# Altium PCB Gandhvedhh.U.K.PcbDoc (part 2 of 2)
Units mil, origin at the board's own origin, x right, y up, seen from the top; angles counter-clockwise.
Board outline 3028 x 3031 mil, 2 copper layers (Top Layer, Bottom Layer); 133 components, 67 nets, 381 pads, 112 vias.
Unrouted connection lines stored in the file: 94.
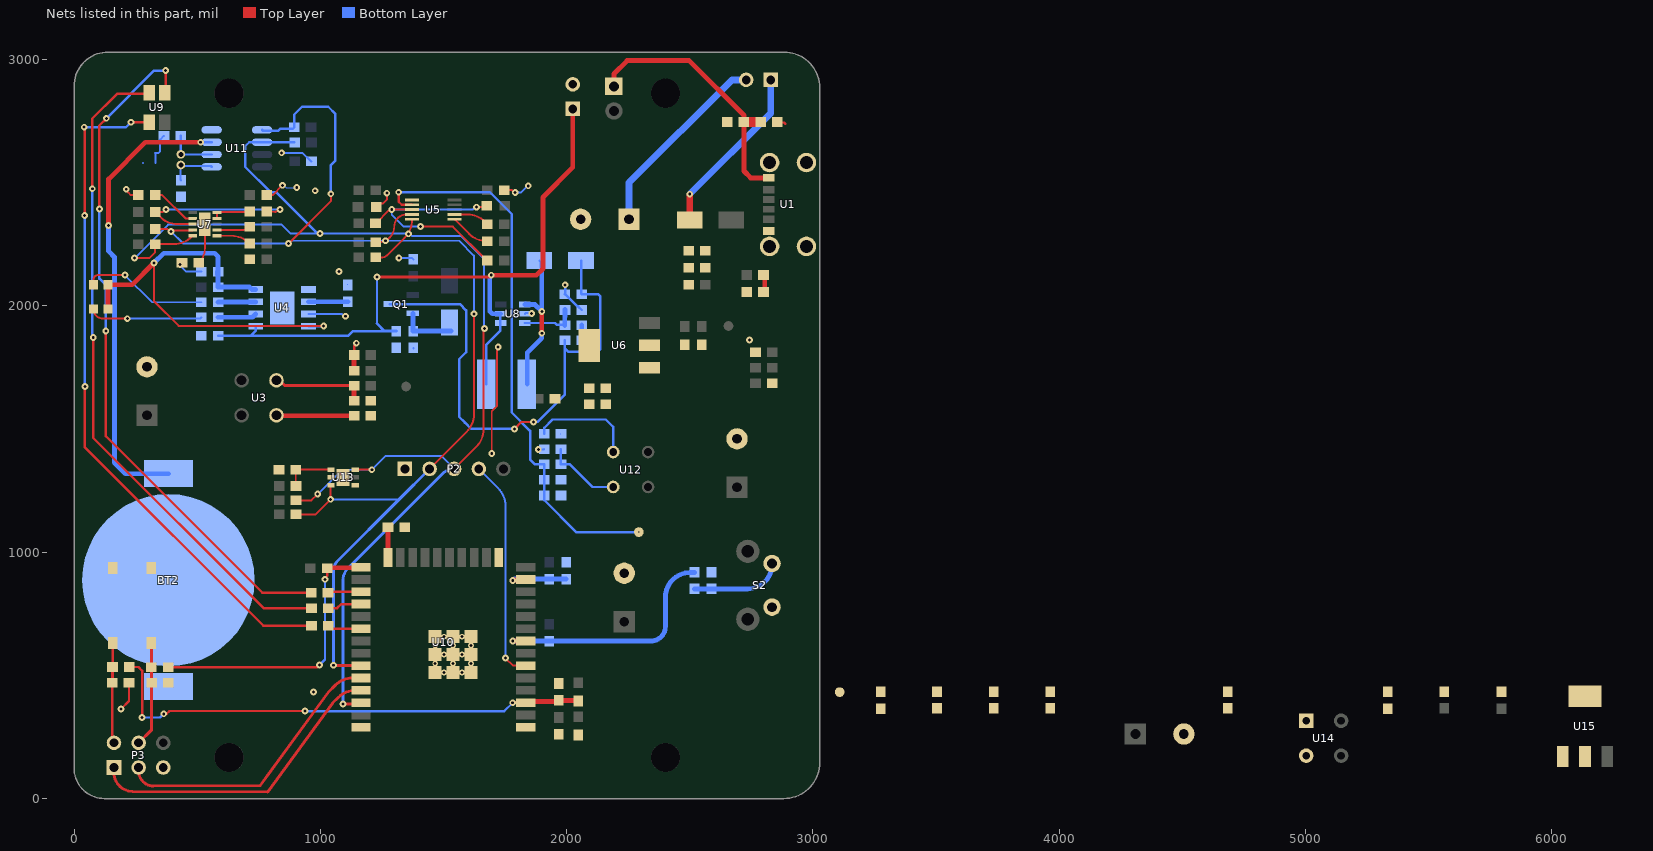
[diagram p2: the nets of this part, all layers, seen from the top]

## Via types
v1: diameter 27.56, hole 11.81, Top Layer to Bottom Layer, tented both sides, 99 vias
v2: diameter 23.62, hole 11.81, Top Layer to Bottom Layer, 12 vias
v3: diameter 27.56, hole 0, Top Layer to Bottom Layer, tented both sides, 1 vias

## Nets (pads, with @x,y where several pads share a name; then routed paths per layer and width w, separated by ;. In a path a pad name is that pad's centre, name@x,y a point inside that pad or via, vN(x,y) a via of type N, cw(c..) or ccw(c..) an arc to the next point about the centre after c; other vN are vias at no path point) (continued)
AP_RST: R37.2 R41.2 U10.8 | length 1682.5
  Top Layer w19.68: v1(1781.16,639.42) U10.8@1834.3,639.42
  Bottom Layer w19.68: v1(1781.16,639.42) R37.2@1928.79,639.42 ; R37.2@1928.79,639.42 2342.18,639.42 ; R37.2@1928.79,639.42 2342.18,639.42 ; 2342.18,639.42 ccw(c2342.18,698.48) 2401.23,698.48 ; 2342.18,639.42 ccw(c2342.18,698.48) 2401.23,698.48 ; 2401.23,698.48 2401.23,817.49 ; 2401.23,817.49 cw(c2501.23,817.49) R41.2@2501.23,917.49 ; 2401.23,817.49 cw(c2501.23,817.49) R41.2@2501.23,917.49 ; R41.2@2501.23,917.49 2519.34,917.49 R41.2@2501.23,917.49
AUX: R22.2 R24.2 U7.8 | length 797.5
  Top Layer w7.87: R22.2@328.93,2381.55 R22.2@330.93,2381.55 ; v1(373.68,2391.39) 369.81,2391.39 359.97,2381.55 R22.2@330.93,2381.55 ; U7.8@481.75,2332.34 419.57,2332.34 ; R24.2@781.69,2383.72 816.59,2381.55 v1(836.27,2391.39) ; R22.2@330.93,2381.55 361.71,2350.78 ; 361.71,2350.78 ccw(c419.57,2432.34) 419.57,2332.34 ; 361.71,2350.77 ccw(c419.57,2432.34) 419.57,2332.34
  Bottom Layer w7.87: v1(373.68,2391.39) v1(836.27,2391.39)
BATTERY_OUT: BT1.1 C10.2 C17.2 L3.1 U4.5 U8.4 U8.5 | length 2950.3
  Top Layer w12: v1(1229.97,2117.97) 1686.97,2117.97 v1(1693.97,2124.97)
  Top Layer w19.68: v1(1693.97,2124.97) 1876.97,2124.97 1903.97,2151.97 1903.97,2441.65 2024.97,2562.65 BT1.1@2024.97,2799.97
  Bottom Layer w9.84: C10.2@584.87,1879.58 1113.58,1879.58 1130.97,1896.97 1308,1896.97 C17.2@1308.71,1897.69 ; 717.97,1879.97 736.97,1898.97 736.97,1916.5 U4.5@737.85,1917.38 ; 1229.97,1928.47 v1(1229.97,2117.97) ; L3.1@1672.89,1682.73 1672.89,1841.89 1730.97,1899.97 1730.97,1965.97 1731.94,1966.94 U8.5@1731.94,1968.16 ; v1@1690.97,2127.97 v1(1693.97,2124.97)
  Bottom Layer w12: 1229.97,1928.47 1260.75,1897.69 C17.2@1308.71,1897.69
  Bottom Layer w19.68: v1@1689.9,2121.13 1687.97,2119.21 1687.97,1977.97 1697.78,1968.16 U8.5@1731.94,1968.16
BATTERY_SWITCH: C19.2 D4.1 Q1.2 | length 379.4
  Bottom Layer w19.68: Q1.2@1375.64,1970.13 1376.63,1969.15 1376.63,1898.68 C19.2@1377.12,1898.18 ; C19.2@1377.61,1897.69 C19.2@1377.12,1898.18 ; C19.2@1377.12,1898.18 1530.17,1898.18 C19.2@1377.12,1898.18
BLUE_I: R26.1 U10.30 | length 138.2
  Top Layer w9.84: R26.1@1031.97,701.98 1044.53,689.42 U10.30@1165.01,689.42
C2H6O: C30.2 R44.1 R45.2 T3.1 U5.7 | length 2269.2
  Top Layer w9.84: v1(1317.97,2461.97) 1317.97,2423.4 1330.3,2411.08 U5.7@1371.71,2411.08
  Bottom Layer w9.84: v1(1317.97,2461.97) 1688.59,2461.97 1776.97,2373.59 1776.97,1567.97 1851.97,1492.97 1851.97,1376.97 1871.97,1356.97 R44.1@1908.97,1356.97 R45.2@1908.97,1294.97 C30.2@1908.95,1230.38 ; C30.2@1908.95,1230.38 1908.95,1211.45 2038.42,1081.97 v3(2292.97,1081.97)
CH410: C36.2 R52.1 R53.2 T4.1 U5.6
EN: C24.2 R33.2 R38.2 U10.3 | length 2064.4
  Top Layer w9.84: R38.2@223.98,533.97 260.97,533.97 275.97,518.97 v1(275.97,328.97) ; v1(363.97,343.97) 375.97,343.97 387.41,355.41 v1(938.17,355.41) ; v1(1780.97,388.97) 1833.86,388.97 U10.3@1834.3,389.42
  Top Layer w19.68: U10.3@1834.3,389.42 1839.03,394.15 1963.44,394.15 C24.2@1968.16,398.87 1969.65,397.38 2045.41,397.38 R33.2@2046.9,395.89
  Bottom Layer w9.84: v1(275.97,328.97) 348.97,328.97 v1(363.97,343.97) ; v1(938.17,355.41) 938.17,353.17 933.97,348.97 939.97,354.97 1746.97,354.97 v1(1780.97,388.97)
EN_F: C27.2 P3.2 R38.1 S1.1 | length 409.2
  Top Layer w9.84: P3.2@154.95,233 P3.2@161.97,225.97 ; C27.2@154.95,470.8 C27.2@155.97,471.83 ; R38.1@155.97,533.97 R38.1@156.97,534.97
  Top Layer w12: P3.2@154.95,233 C27.2@154.95,470.8 ; C27.2@155.97,471.83 R38.1@155.97,533.97 ; R38.1@156.97,534.97 S1.1@156.97,631.42
GND: BT1.2 BT2.2 C1.2 C2.2 C3.2 C4.1 C6.2 C8.1 C10.1 C11.1 C12.2 C13.2 C14.2 C15.2 C16.1 C17.1 C18.1 C19.1 C20.2 C21.1 C22.1 C23.1 C24.1 C25.1 C26.1 C27.1 C28.1 C29.1 C30.1 C31.2 C32.1 C33.1 C34.2 C36.1 C37.2 C38.2 D2.2 FB2.2 L2.2 P2.1 P3.5 R3.2 R9.2 R12.2 R14.1 R15.2 R17.1 R25.2 R27.2 R29.2 R32.2 R39.1 R43.2 R45.1 R46.2 R50.2 R51.2 R53.1 S1.2 S2.2 S3.2 U4.1 U4.3 U4.9 U6.1 U8.2 U10.1 U10.15 U10.38 U10.39 U11.4 U13.2 U13.4 U13.7 U15.1 | length 1956.4
  Top Layer w5: C27.1@223,470.8 C27.1@223.51,470.29 ; v1(903.97,2480.97) v1@908.07,2480.97
  Top Layer w7.87: v1(190.97,363.97) 223,396 C27.1@223,470.8 ; v1@212.35,2473.97 v1(211.97,2473.97) 211.97,2468.65 219,2461.62 219,2461 229.55,2450.45 R25.2@260.93,2450.45 ; C15.2@781.72,2450.45 806.75,2450.45 v1(846.12,2489.82) ; C8.1@1127.05,1791 C8.1@1135.32,1799.27 ; FB2.2@1226.97,2401.97 1240.97,2415.97 1253.97,2415.97 1269.97,2431.97 v1(1269.97,2457.97) ; v1(1695.97,1400.97) 1695.97,1571.97 1716.97,1592.97 1716.97,1822.65 1718.21,1823.88 1718.21,1826.74 1716.97,1827.97 v1(1721.97,1832.97) ; R15.2@1746.26,2470.13 1778.13,2470.13 1787.98,2460.29 v1(1791,2460.29)
  Top Layer w9.84: C8.1@1135.32,1799.27 C8.1@1136.89,1800.84 ; R14.1@1136.92,1737.66 1136.92,1837.92 1145.97,1846.97 v1(1145.97,1848.97)
  Top Layer w19.68: R14.1@1136.92,1737.66 C8.1@1136.89,1800.84
  Bottom Layer w5: v1(846.12,2489.82) 852.22,2489.82 861.06,2480.97 v1(903.97,2480.97) ; v1(1075.97,2139.97) v1@1080.29,2135.66 ; R12.2@1111.86,2085.38 R12.2@1111.86,2087.38 ; R43.2@1974.97,1480.78 R43.2@1976.97,1480.78
  Bottom Layer w7.87: 278.78,2579.97 279.97,2579.97 ; 329.97,2579.97 329.97,2619.97 328.97,2620.97 341.58,2620.97 349.38,2628.78 349.38,2675.41 C26.1@364.95,2690.97 ; v1(429.97,2168.97) 429.97,2164.97 455.34,2139.61 C4.1@516.81,2139.61 ; v1(842.97,2621.97) 927,2621.97 962,2586.98 C22.1@964,2586.98 ; U4.3@951.39,1967.38 1087.64,1967.38 1096.69,1958.32 v1(1102.02,1958.32) ; v1@965.43,433.52 966.97,431.97 v1(971.97,431.97) ; v1(1318.56,2194.54) 1372.24,2194.54 R29.2@1377.61,2189.17 ; C19.1@1377.61,1827.64 C19.1@1377.61,1829.64 ; v1(1791,2460.29) 1796.32,2460.29 1797.2,2461.16 1815.51,2461.16 1842.32,2487.97 v1(1843.97,2487.97) ; U8.2@1831.56,1966.97 U8.2@1830.37,1968.16 1833.18,1970.97 1856.97,1970.97 v1(1857.97,1969.97) ; v1(1885,1417) 1907.2,1417 R46.2@1908.97,1418.78
  Bottom Layer w9.84: C18.1@1993.19,2046.9 C18.1@1995.19,2046.9 ; v1(1993.97,2085.97) 1993.97,2048.12 C18.1@1995.19,2046.9 ; R27.2@2061.22,1983.73 2046.64,1998.31 2043.79,1998.31 C18.1@1995.19,2046.9
  other v1: 2742.97,1861.97 978.97,2467.97
  other v2: 1502.61,511.47 1575.45,511.47 1466.19,547.89 1539.03,547.89 1611.86,547.89 1502.61,584.31 1575.45,584.31 1466.19,620.72 1539.03,620.72 1611.86,620.72 1502.61,657.14 1575.45,657.14
GND_POWER_I: L2.1 R2.2 U1.A12 U2.1 | length 1098.7
  Top Layer w20: U2.1@2191.97,2891.98 2191.97,2941.97 2245.97,2995.97 2497.97,2995.97 2719.97,2773.97 L2.1@2719.97,2746.97 2719.97,2547.97 2747.44,2520.51 U1.A12@2820.97,2520.51
  Top Layer w39.37: L2.1@2719.97,2746.97 R2.2@2787.97,2746.97
GREEN_I: R31.1 U10.27 | length 142.4
  Top Layer w9.84: R31.1@1032.97,838.97 1033.42,839.42 U10.27@1165.01,839.42 ccw(c1171.46,839.42) U10.27@1171.46,832.97
INT: P2.4 U10.6 | length 982.4
  Top Layer w7.87: v1(1751.63,570.53) 1782.73,539.42 U10.6@1834.3,539.42
  Bottom Layer w7.87: P2.4@1643.36,1338.24 1722.34,1259.26 ; v1(1751.63,570.53) 1751.63,1188.55 ; 1722.34,1259.26 cw(c1651.63,1188.55) 1751.63,1188.55 ; 1722.34,1259.26 cw(c1651.63,1188.55) 1751.63,1188.55
IO0: R36.2 R40.2 U10.25 | length 1163.4
  Top Layer w9.84: R40.2@381.97,532.97 987.97,532.97 v1(996.97,541.97) ; v1(1018.97,889.97) 1018.97,894.77 1027.75,903.55 R36.2@1027.75,934.7
  Top Layer w19.68: R36.2@1027.75,934.7 1030.12,937.06 1162.65,937.06 U10.25@1165.01,939.42
  Bottom Layer w9.84: v1(996.97,541.97) 1018.97,563.97 v1(1018.97,889.97)
IO_F: C28.2 P3.4 R40.1 S3.1 | length 427.3
  Top Layer w9.84: S3.1@313,630.88 S3.1@314.32,629.56 ; C28.2@313.97,470.77 C28.2@314.95,469.8
  Top Layer w12: P3.4@261.97,225.97 314.95,278.95 C28.2@314.95,469.8 ; C28.2@313.97,470.77 R40.1@313.97,532.97 S3.1@313.97,629.09
NetBT2_1: BT2.1 U11.3 | length 1906.1
  Top Layer w19.68: v1(139.97,2326.97) 139.97,2515.41 289.54,2664.97 v1(513.97,2664.97)
  Bottom Layer w7.87: U11.3@532.27,2664.98 U11.3@558.61,2664.98
  Bottom Layer w9.84: v1(513.97,2664.97) U11.3@558.61,2664.98
  Bottom Layer w19.68: v1(139.97,2326.97) 139.97,2222.63 163.97,2198.63 163.97,1363.77 208.77,1318.97 BT2.1@382.97,1318.97
NetC1_1: C1.1 C2.1 C3.1 L1.1 S4.2 | length 796.8
  Bottom Layer w27.56: C1.1@2253.6,2352.02 2253.6,2500.6 2670.97,2917.97 S4.2@2728.97,2917.97
NetC7_1: C7.1 C9.1 FB1.1 U5.8 | length 1049
  Top Layer w7.87: C9.1@1224,2335.98 1226,2335.98 1278.24,2388.21 1286.21,2388.21 v1(1289.97,2391.97) 1290.27,2391.68 1371.42,2391.68 U5.8@1371.71,2391.39 ; v1(1407.14,2322.49) 1538.44,2322.49 1676.23,2184.7 C7.1@1678.23,2184.7 ; v1(1633.52,2401.23) 1669.95,2401.23 FB1.1@1675.26,2406.55
  Bottom Layer w7.87: v1(1407.14,2322.49) 1338.24,2322.49 1289.97,2370.76 v1(1289.97,2391.97) 1618.93,2391.97 1628.19,2401.23 v1(1633.52,2401.23)
NetC11_2: C11.2 C14.1 R16.2 U6.2 U6.4
NetC25_2: C25.2 U11.1 X1.1 | length 190.2
  Bottom Layer w9.84: C25.2@433.97,2510.77 431.97,2512.77 431.97,2570.07 433.6,2571.69 436.95,2568.33 555.25,2568.33 U11.1@558.61,2564.98
NetC26_2: C26.2 U11.2 X1.2 | length 201.3
  Bottom Layer w9.84: C26.2@433,2690.97 433.61,2690.37 X1.2@433.61,2615.75 X1.2@433.61,2615.01 ; X1.2@433.61,2614.99 U11.2@558.61,2614.98
NetC29_2: C29.2 R41.1 S2.1 | length 375
  Bottom Layer w7.87: S2.1@2834.3,951.46 S2.1@2834.3,954.38
  Bottom Layer w19.68: R41.1@2519.34,851.49 C29.2@2588.24,851.46 2734.3,851.46 ccw(c2734.3,951.46) S2.1@2834.3,951.46
NetC34_1: C34.1 R47.1 U13.1 | length 209.4
  Top Layer w7.87: R47.1@900.97,1268.97 900,1269.95 C34.1@900,1334.97 900.5,1335.47 U13.1@1042.76,1335.47
NetC38_1: C38.1@5334.97,364.95 R54.2 U15.2 U15.4
NetD1_1: D1.1 S4.1 | length 704.3
  Top Layer w9.84: D1.1@2499.66,2350.05 D1.1@2499.97,2350.37
  Top Layer w27.56: D1.1@2499.97,2350.37 v1(2499.97,2453.97)
  Bottom Layer w27.56: v1(2499.97,2453.97) 2828.97,2782.97 S4.1@2828.97,2917.97
NetD2_1: D2.1 R1.2 | length 73.3
  Top Layer w19.68: D2.1@2799.41,2056.75 2804.78,2062.12 2804.78,2120.27 R1.2@2799.41,2125.64
NetD3_2: D3.2 L3.2 U8.1 | length 615.6
  Top Layer w19.68: v1(1899.27,1889.42) v1(1899.27,1978.01)
  Bottom Layer w7.87: L3.2@1838.24,1682.73 L3.2@1840.21,1682.73 ; D3.2@1889.42,2184.7 D3.2@1899.27,2174.86
  Bottom Layer w19.68: U8.1@1832.34,2007.53 U8.1@1830.37,2005.56 1871.71,2005.56 v1(1899.27,1978.01) D3.2@1899.27,2174.86 ; L3.2@1840.21,1682.73 1840.21,1810.68 1899.27,1869.74 v1(1899.27,1889.42)
NetLED_G1_1: LED_G1.1 R5.1 | length 463.2
  Top Layer w7.87: LED_G1.1@78.4,1987.85 ccw(c117.77,1987.85) 117.77,1948.48 v1(216.19,1948.48)
  Bottom Layer w7.87: v1(216.19,1948.48) 511.33,1948.48 R5.1@516.84,1953.99
NetLED_R1_1: LED_R1.1 R4.1 | length 654.3
  Top Layer w7.87: LED_R1.1@78.4,2086.27 78.4,2105.96 ; 78.4,2105.96 cw(c98.08,2105.96) 98.08,2125.64 ; 78.4,2105.96 cw(c98.08,2105.96) 98.08,2125.64 ; 98.08,2125.64 v1(206.35,2125.64) 98.08,2125.64
  Bottom Layer w7.87: v1(206.35,2125.64) 316.79,2015.21 R4.1@516.84,2015.21
NetR2_1: R2.1 U1.B12 U1.MH1 U1.MH2 U1.MH3 U1.MH4 | length 35.2
  Top Layer w9.84: R2.1@2855.97,2746.97 2857.97,2744.97 2882.21,2744.97 2887.97,2739.21
NetR4_2: R4.2 U4.7 | length 153.9
  Bottom Layer w19.68: R4.2@584.84,2015.21 585.92,2016.29 736.76,2016.29 U4.7@737.85,2017.38
NetR5_2: R5.2 U4.6 | length 158.6
  Bottom Layer w19.68: R5.2@584.84,1953.99 724.46,1953.99 U4.6@737.85,1967.38
NetR6_2: R6.2 U5.2 | length 238.1
  Top Layer w7.87: U5.2@1544.93,2371.71 1597.47,2371.71 ; 1597.47,2371.71 cw(c1597.47,2271.71) R6.2@1668.18,2342.42 ; 1597.47,2371.71 cw(c1597.47,2271.71) R6.2@1668.18,2342.42 ; R6.2@1668.18,2342.42 R6.2@1678.26,2332.34 R6.2@1668.18,2342.42
NetR9_1: R9.1 R10.2 U3.2 | length 388.8
  Top Layer w9.84: U3.2@822.97,1698.97 U3.2@821.84,1697.84 U3.2@835.16,1697.84
  Top Layer w12: U3.2@835.16,1697.84 856.55,1676.44 R10.2@1136.92,1676.44
  Top Layer w19.68: R9.1@1134.92,1615.22 R9.1@1136.92,1615.22 R10.2@1136.92,1676.44
NetR11_1: R11.1 U5.1 | length 331.4
  Top Layer w7.87: 1604.23,2292.73 ccw(c1674.94,2363.44) R11.1@1674.94,2263.44 ; 1604.23,2292.73 ccw(c1674.94,2363.44) R11.1@1674.94,2263.44 ; 1604.23,2292.73 U5.1@1544.93,2352.02 1604.23,2292.73 ; R11.1@1674.94,2263.44 R11.1@1678.26,2263.44 R11.1@1674.94,2263.44
NetR12_1: R12.1 U4.2 | length 160.5
  Bottom Layer w19.68: U4.2@951.39,2017.38 R12.1@1111.86,2017.38
NetR17_2: R17.2 U7.11 | length 235.4
  Top Layer w7.87: U7.11@531.16,2332.34 531.16,2235.34 ; R17.2@506.1,2174.86 ccw(c445.61,2235.34) 531.16,2235.34 ; R17.2@506.1,2174.86 ccw(c445.61,2235.34) 531.16,2235.34 ; R17.2@506.1,2174.86 508.1,2174.86 R17.2@506.1,2174.86
NetR18_2: R18.2 U7.2 | length 273.6
  Top Layer w7.87: 680.42,2308.71 ccw(c680.42,2355.76) R18.2@713.69,2322.49 cw(c680.42,2355.76) 680.42,2308.71 ; 680.42,2308.71 U7.2@580.56,2308.71 680.42,2308.71
NetR19_2: R19.2 U7.1 | length 141.9
  Top Layer w7.87: U7.1@580.56,2285.09 638.77,2285.09 cw(c638.77,2185.09) 709.48,2255.8 711.69,2253.6 R19.2@713.69,2253.6
NetR23_2: R23.2 R42.1 | length 61.2
  Bottom Layer w19.68: R23.2@2061.22,1861.28 R42.1@2061.22,1922.51
NetR24_1: R24.1 U7.4 U7.5 | length 293.5
  Top Layer w7.87: U7.4@580.56,2355.96 U7.5@580.56,2379.58 580.56,2381.35 U7.5@580.37,2381.55 ; U7.5@580.37,2381.55 R24.1@708.46,2381.55 ; U7.5@580.37,2381.55 R24.1@708.46,2381.55 ; R24.1@708.46,2381.55 ccw(c708.46,2388.95) R24.1@713.69,2383.72 cw(c708.46,2388.95) R24.1@708.46,2381.55
NetR25_1: R25.1 U7.7 | length 192
  Top Layer w7.87: R25.1@328.93,2450.45 357.93,2450.45 452.42,2355.96 U7.7@481.75,2355.96
NetR26_2: R26.2 U9.1 | length 2793.8
  Top Layer w9.84: v1(40.97,2725.97) 42.97,2723.97 v1(42.97,2367.97) ; v1(43.97,1672.97) 43.97,1425.97 767.97,701.98 R26.2@963.97,701.98 ; v1(230.97,2745.97) 303.53,2745.97 U9.1@304.48,2746.92
  Bottom Layer w9.84: v1(40.97,2725.97) 210.61,2725.97 230.61,2745.97 v1(230.97,2745.97) ; v1(42.97,2367.97) 42.43,2367.43 42.43,1674.52 v1(43.97,1672.97)
NetR27_1: R27.1 R42.2 U8.3 | length 231.3
  Bottom Layer w9.84: U8.3@1830.37,1930.76 1953.19,1930.76 1960.97,1922.97 1989.75,1922.97 R42.2@1992.22,1920.51
  Bottom Layer w19.68: R42.2@1992.22,1920.51 1992.25,1922.52 R27.1@1993.22,1983.73 R27.1@1993.22,1985.73
NetR30_2: R30.2 U9.4 | length 2744.5
  Top Layer w9.84: v1(73.97,2475.97) 73.97,2760.97 174.47,2861.47 300.92,2861.47 U9.4@304.48,2865.03 ; v1(77.97,1871.97) 77.97,1463.97 768.97,772.97 R30.2@963.97,772.97
  Bottom Layer w9.84: v1(73.97,2475.97) 73.97,1875.97 v1(77.97,1871.97)
NetR31_2: R31.2 U9.3 | length 2829.9
  Top Layer w9.84: v1(102.97,2393.97) 102.97,2731.97 101.97,2732.97 v1(130.97,2761.97) ; v1(128.97,1897.97) 128.97,1470.97 763.97,835.97 R31.2@962.97,835.97 ; U9.3@367.47,2865.03 361.97,2870.53 371.97,2880.53 v1(371.97,2955.97)
  Bottom Layer w9.84: v1(102.97,2393.97) 102.97,2110.97 128.97,2084.97 v1(128.97,1897.97) ; v1(130.97,2761.97) 324.97,2955.97 v1(371.97,2955.97)
NetR39_2: R39.2 U10.24 | length 123.3
  Top Layer w19.68: U10.24@1274.66,978.79 R39.2@1274.71,1102.02
NetR43_1: R43.1 U12.1 | length 432.9
  Bottom Layer w9.84: R43.1@1908.97,1480.78 1908.97,1504.97 1942.97,1538.97 2158.97,1538.97 2189.11,1508.84 U12.1@2189.11,1406.84
NetR44_2: R44.2 R46.1 U12.2 | length 312
  Bottom Layer w9.84: R46.1@1976.97,1418.78 R44.2@1976.97,1356.97 2012.97,1356.97 2104.84,1265.11 U12.2@2189.11,1265.11
NetR50_1: R50.1 U14.1
NetR51_1: R51.1 R52.2 U14.2
RED_I: R30.1 U10.28 | length 139.9
  Top Layer w9.84: R30.1@1031.97,772.97 1068.24,772.97 1084.69,789.42 U10.28@1165.01,789.42
RXD: P3.3 U10.34 | length 1164.8
  Top Layer w11.81: P3.3@261.97,125.97 261.97,111.63 ccw(c322.97,111.63) 322.97,50.63 754.97,51.97 758.97,56.97 763.97,63.97 781.97,88.97 1033.12,432.73 1060.53,460.13 cw(c1131.24,389.42) 1131.24,489.42 U10.34@1165.01,489.42
SCL: P2.3 R7.2 R20.2 R34.2 R49.1 U5.10 U7.10 U10.36 U11.6 U13.6 | length 5793.1
  Top Layer w7.87: v1(245.72,2194.54) 304.78,2194.54 328.93,2218.7 R20.2@328.93,2251.43 406.66,2251.43 ; U7.10@481.75,2285.09 U7.10@477.37,2280.72 ; R49.1@900.97,1210.97 963.97,1210.97 v1(988.97,1235.97) ; U13.6@1147.09,1335.47 U13.6@1141.19,1335.47 1141.43,1335.22 1208.73,1335.22 v1(1208.97,1334.97) v1@1212.97,1334.97 ; R7.2@1220.13,2194.54 1223.28,2197.69 R7.2@1224.6,2197.69 1253.18,2197.69 ; U5.10@1371.71,2348.17 cw(c1271.71,2348.17) 1342.42,2277.46 1269.34,2204.38 ; P2.3@1543.36,1338.24 1633.76,1428.64 ccw(c1563.05,1499.35) 1663.05,1499.35 1663.05,1906.05 v1(1665.97,1908.97) ; 406.66,2251.43 ccw(c406.66,2351.43) U7.10@477.37,2280.72 ; 406.66,2251.43 ccw(c406.66,2351.43) U7.10@477.37,2280.72 ; 1253.18,2197.69 ccw(c1253.18,2220.55) 1269.34,2204.38 ; 1253.18,2197.69 ccw(c1253.18,2220.55) 1269.34,2204.38
  Top Layer w11.81: v1(1092.18,383.52) 1159.11,383.52 U10.36@1165.01,389.42
  Bottom Layer w7.87: v1(245.72,2194.54) 381.55,2330.37 842.58,2330.37 878.97,2293.97 v1@988.97,2293.97 ; v1(988.97,1235.97) 1087.97,1334.97 v1(1208.97,1334.97) 1264.97,1390.97 1490.63,1390.97 P2.3@1543.36,1338.24 ; v1(997.97,2293.97) 998.22,2293.73 1362.32,2293.73 1372.38,2283.66 1572.35,2283.66 1664.35,2191.66 1664.35,1910.6 v1(1665.97,1908.97)
  Bottom Layer w9.84: R34.2@894.97,2664.98 U11.6@763.34,2664.98 710.98,2664.98 694.97,2648.97 694.97,2564.91 798.91,2460.97 821.97,2460.97 988.97,2293.97 v1(997.97,2293.97)
  Bottom Layer w11.81: v1(1092.18,383.52) 1092.18,887.06 cw(c1159.66,887.06) 1111.94,934.78 1495.64,1318.48 cw(c1543.36,1270.76) P2.3@1543.36,1338.24
  other v1: 1357.93,2292.97
SDA: P2.2 R8.2 R21.2 R35.2 R48.1 U5.9 U7.9 U10.33 U11.5 U13.3 | length 5124.6
  Top Layer w7.87: R21.2@328.93,2312.65 378.19,2312.65 388.03,2302.81 v1(393.36,2302.81) 396.9,2306.35 479.38,2306.35 U7.9@481.75,2308.71 ; v1(870.97,2253.7) 1042.53,2425.26 v1(1042.53,2455.53) ; R48.1@900.97,1153.97 980.97,1153.97 v1(1041.97,1214.97) 1041.97,1271.69 U13.3@1042.76,1272.48 ; 1247.34,2259.78 ccw(c1236.91,2321.97) 1299.97,2321.97 cw(c1349.71,2321.97) 1349.71,2371.71 U5.9@1371.71,2371.71 ; P2.2@1443.36,1338.24 1594.39,1489.27 ccw(c1523.68,1559.98) 1623.68,1559.98 v1(1623.68,1968.16)
  Top Layer w11.81: v1@1054.38,539.42 U10.33@1165.01,539.42
  Bottom Layer w7.87: v1(393.36,2302.81) 442.47,2253.7 v1(870.97,2253.7) 882.25,2264.97 v1(1264.97,2264.97) 1563.08,2264.97 1623.68,2204.38 v1(1623.68,1968.16) ; v1(1041.97,1214.97) 1320.09,1214.97
  Bottom Layer w9.84: U11.5@763.34,2714.98 767.19,2711.12 828.12,2711.12 835.97,2718.97 887.75,2718.97 R35.2@893.98,2725.2
  Bottom Layer w10: R35.2@893.98,2725.2 893.98,2776.98 925.9,2808.9 1032.05,2808.9 1060.97,2779.97 1060.97,2590.97 1042.53,2572.53 v1(1042.53,2455.53)
  Bottom Layer w11.81: v1(1052.81,541) 1052.81,928.01 ; 1053.01,924.85 cw(c1108.65,924.84) 1054.61,938.08 cw(c1108.65,924.84) 1069.31,964.19 1320.09,1214.97 P2.2@1443.36,1338.24
STEP_UP_OUT: C18.2 D3.1 Q1.3 R23.1 | length 2079.1
  Top Layer w9.84: v1(1787.97,1500.97) 1815.97,1528.97 v1(1864.97,1528.97)
  Bottom Layer w9.84: Q1.3@1281.16,2007.53 1566.41,2007.53 1592.09,1981.86 1592.09,1812.34 1563.43,1783.68 1563.43,1550.13 1586.97,1526.59 1612.59,1500.97 v1(1787.97,1500.97) ; v1(1864.97,1528.97) 1881.97,1528.97 1992.97,1639.97 1992.97,1732.97 1993.22,1733.22 1993.22,1827.73 ; R23.1@1993.22,1861.28 1993.22,1827.73 ; D3.1@2058.71,2184.7 2058.71,2049.44 C18.2@2061.25,2046.9 2129.04,2046.9 2136.97,2038.97 2136.97,1824.97 2126.97,1814.97 2005.97,1814.97 1993.22,1827.73
T_ADC: R28.2 R32.1 U10.13 | length 273.5
  Top Layer w19.68: v1(1781.16,885.49) 1782.66,886.99 1831.87,886.99 U10.13@1834.3,889.42
  Bottom Layer w19.68: v1(1781.16,885.49) 1783.29,885.49 1788.66,890.86 R28.2@1928.79,890.86 R32.1@1997.69,890.86
TGS2602_GND: R3.1 U3.1 | length 322.8
  Top Layer w9.84: U3.1@821.84,1553.97 U3.1@821.84,1556.11 ccw(c823.95,1556.11) U3.1@823.95,1554
  Top Layer w19.68: U3.1@821.84,1553.97 R3.1@1136.92,1554 R3.1@1135.34,1552.42
TXD: P3.1 U10.35 | length 1346.9
  Top Layer w11.81: P3.1@161.97,125.97 161.97,104.97 ccw(c237.97,104.97) 237.97,28.97 785.97,25.97 1049.73,387.34 1072.52,410.13 ; U10.35@1165.01,439.42 U10.35@1143.23,439.42 ; 1072.52,410.13 cw(c1143.23,339.42) U10.35@1143.23,439.42 ; 1072.52,410.13 cw(c1143.23,339.42) U10.35@1143.23,439.42
VCC_C: C4.2 LED_G1.2 LED_R1.2 R13.1 U4.4 U4.8 | length 1865.7
  Top Layer w7.87: v1(324.46,2174.86) 324.46,2018.95 424.46,1918.95 v1(1013.44,1918.95)
  Top Layer w19.68: LED_G1.2@137.45,1987.85 LED_R1.2@137.45,2086.27 235.88,2086.27 v1(324.46,2174.86)
  Bottom Layer w7.87: U4.4@951.39,1917.38 1011.86,1917.38 ccw(c1011.86,1918.95) v1(1013.44,1918.95)
  Bottom Layer w19.68: v1(324.46,2174.86) 363.83,2214.23 570.53,2214.23 584.87,2199.88 C4.2@584.87,2139.61 ; C4.2@582.38,2139.41 584.85,2108.02 ; R13.1@584.84,2076.43 712.55,2076.43 721.61,2067.38 U4.8@737.85,2067.38 ; R13.1@584.84,2076.43 C4.2@584.87,2139.61
pads on no net: S2. U1.A5 U1.B5 U5.5 U7.3 U8.6 U10.4 U10.5 U10.7 U10.9 U10.10 U10.11 U10.12 U10.14 U10.16 U10.17 U10.18 U10.19 U10.20 U10.21 U10.22 U10.23 U10.26 U10.29 U10.31 U10.32 U10.37 U11.7

## Polygon pours and split planes (outlines as drawn)
NetC1_1 on Top Layer "NETC1_1_L01_P002" (solid, remove dead copper, pour order 2): 2198.06,2419.96 ccw(c2198.06,2400.28) 2178.38,2400.28 2178.38,2089.25 ccw(c2204.95,2089.25) 2204.95,2062.68 2500.23,2062.68 ccw(c2500.23,2079.41) 2516.96,2079.41 2516.96,2283.15 cw(c2521.88,2283.15) 2521.88,2288.07 2549.44,2288.07 ccw(c2549.44,2293.98) 2555.34,2293.98 2555.34,2408.15 ccw(c2543.53,2408.15) 2543.53,2419.96
GND on Top Layer "                          " (solid, pour order 28): 9019.62,1934.65 cw(c9119.62,1934.65) 9119.62,2034.65 11947.62,2034.65 cw(c11947.62,1934.65) 12047.62,1934.65 12047.62,-785.35 12047.62,-896.35 cw(c11947.62,-896.35) 11947.62,-996.35 9138.59,-996.35 9134.56,-996.35 9119.62,-996.35 cw(c9119.62,-896.35) 9019.62,-896.35
NetC11_2 on Top Layer "NETC11_2_L01_P006" (solid, remove dead copper, pour order 6): 2194.54,1869.74 cw(c2194.54,1885.49) 2178.79,1885.49 2178.79,1965.21 ccw(c2167.97,1965.21) 2167.97,1976.04 2042.97,1976.04 ccw(c2042.97,1957.34) 2024.27,1957.34 2024.27,1693.56 cw(c2014.42,1693.56) 2014.42,1683.71 1933.45,1683.71 ccw(c1933.45,1673.15) 1922.89,1673.15 1922.89,1577.02 ccw(c1932.34,1577.02) 1932.34,1567.57 2105.96,1567.57 ccw(c2105.96,1579.38) 2117.77,1579.38 2117.77,1705.37 cw(c2121.71,1705.37) 2121.71,1709.31 2165.01,1709.31 ccw(c2165.01,1722.1) 2177.81,1722.1 2177.81,1800.84 cw(c2191.59,1800.84) 2191.59,1814.62 2375.64,1814.62 ccw(c2375.64,1828.4) 2389.42,1828.4 2389.42,1860.88 ccw(c2380.56,1860.88) 2380.56,1869.74
3V3 on Top Layer "3V3_L01_P008" (solid, remove dead copper, pour order 8): 2123.72,432.92 cw(c2123.72,423.08) 2133.57,423.08 2133.57,368.28 cw(c2129.3,368.28) 2129.3,364.02 2109.09,364.02 ccw(c2109.09,362.91) 2107.98,362.91 1794.85,362.91 ccw(c1794.85,352.21) 1784.16,352.21 1784.16,323.67 ccw(c1791.05,323.67) 1791.05,316.78 2267.42,316.78 ccw(c2267.42,329.57) 2280.22,329.57 2280.22,715.4 ccw(c2236.91,715.4) 2236.91,758.71 2050.89,758.71 ccw(c2050.89,727.21) 2019.39,727.21 2019.39,447.55 ccw(c2034.02,447.55) 2034.02,432.92
5VCC on Top Layer "5VCC_L01_P004" (solid, remove dead copper, pour order 4): 2649.2,2149.33 ccw(c2649.2,2143.43) 2643.29,2143.43 2643.29,2115.87 cw(c2636.4,2115.87) 2636.4,2108.98 2546.84,2108.98 ccw(c2546.84,2102.09) 2539.95,2102.09 2539.95,2031.8 cw(c2519.68,2031.8) 2519.68,2011.54 2305.76,2011.54 ccw(c2305.76,1994.81) 2289.03,1994.81 2289.03,1898.28 ccw(c2299.79,1898.28) 2299.79,1887.52 2654.12,1887.52 ccw(c2654.12,1923.94) 2690.54,1923.94 2690.54,2093.23 cw(c2697.43,2093.23) 2697.43,2100.12 2748.61,2100.12 ccw(c2748.61,2108) 2756.48,2108 2756.48,2147.37 ccw(c2754.51,2147.37) 2754.51,2149.33
GND on Bottom Layer "Bottom Layer-GND" (solid, pour order 32): 4458.1,5944.49 cw(c4558.1,5944.49) 4558.1,6044.49 7386.1,6044.49 cw(c7386.1,5944.49) 7486.1,5944.49 7486.1,3113.49 cw(c7386.1,3113.49) 7386.1,3013.49 4558.1,3013.49 cw(c4558.1,3113.49) 4458.1,3113.49
NetBT2_1 on Bottom Layer "Bottom Layer-NetBT2_1" (solid, pour order 20): 245.72,1259.5 245.72,1377.61 765.8,1377.61 cw(c765.8,1277.61) 865.8,1277.61 865.8,493.36 cw(c765.8,493.36) 765.8,393.36 245.72,393.36 245.72,511.47 659.11,511.47 ccw(c659.11,609.9) 757.53,609.9 757.53,1159.5 ccw(c657.53,1159.5) 657.53,1259.5

## Keep-outs
Keep-Out Layer:
  circle w7.87: c2401.23,166.98 r94.53
  circle w7.87: c629.58,166.98 r94.53
  circle w7.87: c629.58,2863.83 r94.53
  circle w7.87: c2401.23,2863.83 r94.53
  lines w10: -0.03,114.91 -0.03,122.97 -0.03,2892.97 -0.03,2902.02 2.34,2919.95 7.02,2937.43 13.94,2954.14 22.99,2969.81 34,2984.16 46.79,2996.95 61.14,3007.96 76.81,3017.01 93.52,3023.93 110.99,3028.61 128.93,3030.97 137.97,3030.97 1121.71,3030.97 1121.71,2578.4 1909.11,2578.4 1909.11,3030.97 2882.97,3030.97 2892.48,3030.97 2911.32,3028.49 2929.68,3023.57 2947.24,3016.3 2963.71,3006.8 2978.79,2995.22 2992.23,2981.78 3003.8,2966.7 3013.3,2950.24 3020.57,2932.68 3025.49,2914.32 3027.97,2895.48 3027.97,2885.97 3027.97,145.97 3027.97,136.4 3025.48,117.43 3020.52,98.94 3013.2,81.26 3003.63,64.69 2991.98,49.5 2978.45,35.97 2963.26,24.32 2946.69,14.75 2929.01,7.43 2910.52,2.47 2891.54,-0.03 2881.97,-0.03 1891.97,-0.03 1891.97,248.97 1105.97,248.97 1105.97,-0.03 122.97,-0.03 114.91,-0.03 98.93,2.08 83.35,6.25 68.46,12.42 54.49,20.48 41.7,30.3 30.3,41.7 20.48,54.49 12.42,68.46 6.25,83.35 2.08,98.93 -0.03,114.91

## Other copper
Top Layer:
  region net NetR2_1: 2895.97,2320.97 2894.97,2319.97 2749.97,2319.97 2749.97,2292.97 ccw(c2849.97,2292.97) 2849.97,2192.97 3011.97,2192.97 3011.97,2779.97 2828.97,2779.97 2828.97,2696.97 cw(c2766.97,2696.97) 2766.97,2634.97 2766.97,2546.97 2894.97,2546.97 2894.97,2322.97 cw(c2891.98,2322.97) 2891.97,2319.97
  region net 5VCC_D: 2276.97,1256.97 ccw(c2365.97,1256.97) 2365.97,1167.97 2754.97,1167.97 2754.97,1346.97 2481.97,1346.97 2481.97,1424.97 ccw(c2425.97,1424.97) 2425.97,1480.97 2338.97,1480.97 ccw(c2338.97,1418.97) 2276.97,1418.97
  region net 5VCC_D: 185.85,1595.24 cw(c215.38,1595.24) 215.38,1624.77 500.81,1624.77 ccw(c500.81,1664.14) 540.18,1664.14 540.18,1733.04 cw(c569.71,1733.04) 569.71,1762.56 697.66,1762.56 cw(c697.66,1723.19) 737.03,1723.19 737.03,1546.03 cw(c677.97,1546.03) 677.97,1486.97 205.53,1486.97 cw(c205.53,1506.66) 185.85,1506.66
  pour cut-out: 239,2508 287,2508 287,2481 286.21,2480.21 240.18,2480.21
  pour cut-out: 1062,1816.68 1099,1816.68 1099,1702 1062,1702
Bottom Layer:
  rectangle net GND: 19.82,2553.97 371.2,2632.71

## Silkscreen, mask and mechanical layers (free items; w line width, h text height)
Top Overlay:
  text "Viliso Technologies Pvt Ltd." at 76.03,1031.97 h39.37 r90
Bottom Solder:
  rectangle: 19.82,2553.97 371.76,2634.08
Mechanical 1:
  lines w10: -0.03,114.91 -0.03,122.97 -0.03,2892.97 -0.03,2902.02 2.34,2919.95 7.02,2937.43 13.94,2954.14 22.99,2969.81 34,2984.16 46.79,2996.95 61.14,3007.96 76.81,3017.01 93.52,3023.93 110.99,3028.61 128.93,3030.97 137.97,3030.97 1121.71,3030.97 1121.71,2578.4 1909.11,2578.4 1909.11,3030.97 2882.97,3030.97 2892.48,3030.97 2911.32,3028.49 2929.68,3023.57 2947.24,3016.3 2963.71,3006.8 2978.79,2995.22 2992.23,2981.78 3003.8,2966.7 3013.3,2950.24 3020.57,2932.68 3025.49,2914.32 3027.97,2895.48 3027.97,2885.97 3027.97,145.97 3027.97,136.4 3025.48,117.43 3020.52,98.94 3013.2,81.26 3003.63,64.69 2991.98,49.5 2978.45,35.97 2963.26,24.32 2946.69,14.75 2929.01,7.43 2910.52,2.47 2891.54,-0.03 2881.97,-0.03 1896.97,-0.03 1896.97,248.97 1110.97,248.97 1110.97,-0.03 122.97,-0.03 114.91,-0.03 98.93,2.08 83.35,6.25 68.46,12.42 54.49,20.48 41.7,30.3 30.3,41.7 20.48,54.49 12.42,68.46 6.25,83.35 2.08,98.93 -0.03,114.91

## Text inside footprints (layer, text, board x,y; h text height)
BT1: Top Overlay "+" at 2047.69,2705.49 h45.28 r90
C1: Top Overlay "+" at 2415.01,2381.55 h78.74 r180
C6: Top Overlay "+" at 325.5,1394.56 h78.74 r90
C20: Top Overlay "+" at 2263.44,556.75 h78.74 r90
C31: Top Overlay "+" at 2866.97,1157.97 h78.74 r90
C37: Top Overlay "+" at 4148.13,232.45 h78.74
D2: Top Overlay "K" at 2676.82,2037.06 h39.37
P3: Top Overlay "1" at 65.12,106.29 h39.37; Top Overlay "2" at 55.28,204.71 h39.37; Top Overlay "5" at 429.3,106.29 h39.37; Top Overlay "6" at 428.97,203.71 h39.37
U2: Top Overlay "+" at 2252.97,2798.97 h59.06 r270
U9: Top Overlay "+" at 424.56,2668.18 h32 r90
U10: Top Overlay "38" at 1263.44,305.17 h47.24 r180; Top Overlay "24" at 1295.92,928.95 h47.24 r180; Top Overlay "15" at 1746.71,928.4 h47.24 r180; Top Overlay "1" at 1776.23,305.17 h47.24 r180
U14: Top Overlay "4" at 5193.07,292.22 h59.06; Top Overlay "3" at 5190.12,156.39 h59.06; Top Overlay "2" at 4938.04,155.7 h59.06; Top Overlay "1" at 4938.04,292.22 h59.06